# Altium PCB PCB1.PcbDoc
Units mil, origin at the board's own origin, x right, y up, seen from the top; angles counter-clockwise.
Board outline 4330 x 3937 mil, 2 copper layers (Top Layer, Bottom Layer); 241 components, 149 nets, 694 pads, 0 vias.
Unrouted connection lines stored in the file: 335.
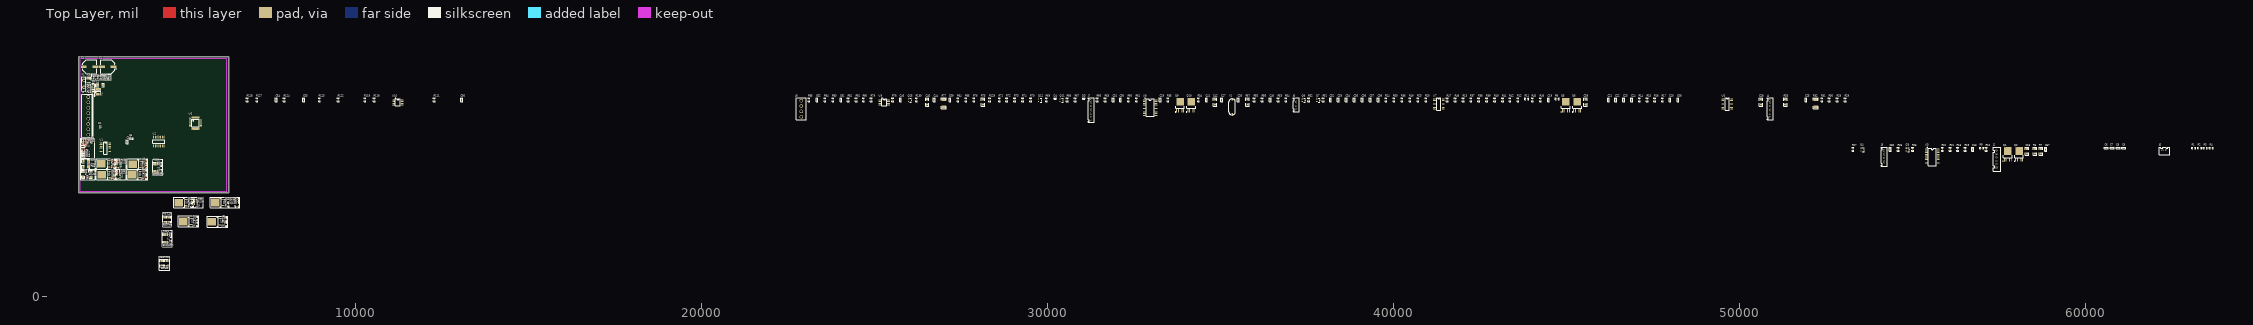
[diagram p0: Top Layer view]
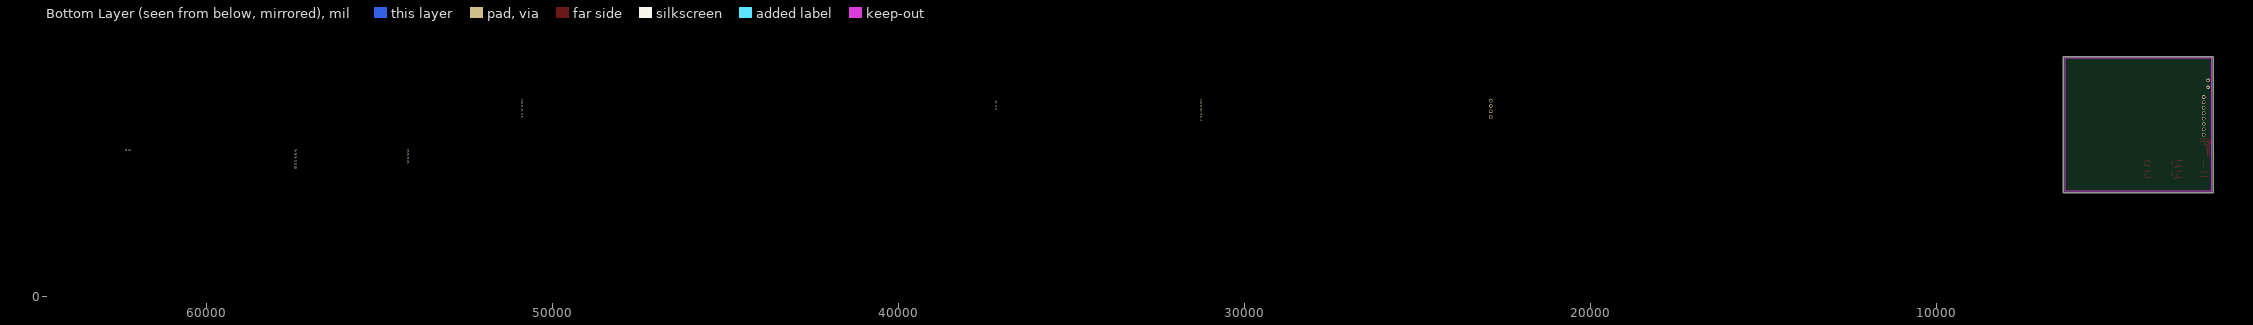
[diagram p1: Bottom Layer view, seen from below]

## Layer stack, top to bottom
Top Layer: signal copper 1.4
Dielectric: dielectric 12.6, FR-4, Dk 4.8
Bottom Layer: signal copper 1.4

## Board outline
2000,3000 6330,3000 6330,6937 2000,6937

## Design rules (kind name [scope] priority, off if disabled: settings)
Clearance [All] p1: gap=8
ComponentClearance [All] p1: gap=1 collisioncheckmode=3 verticalgap=1 showdistances=FALSE
PolygonConnect [All] p1: connectstyle=Relief reliefconductorwidth=10 reliefentries=4 polygonreliefangle="90 Angle"
RoutingVias [All] p1: holewidth=15 width=30 viastyle="Through Hole" minholewidth=28 minwidth=50 maxholewidth=28 maxwidth=50
SilkscreenOverComponentPads [All] p1: minsilkscreentomaskgap=10
SolderMaskExpansion [All] p1: expansion=4
Width [All] p1: maxlimit=50 minlimit=10 preferedwidth=10
26 further rules are at their usual default settings.

## Components (designator, comment, footprint, x,y, rotation, side; value= is the part's Value field where it differs from the comment)
C1 "470uF/35V" CAP_SO_10*10 2160,6650 r90 top
C2 "470uF/35V" CAP_SO_10*10 2995,6640 r270 top
C3 "C1206" 1206 2290,6180 r90 top
C4 "C1206" 1206 2685,6115 r180 top
C5 "C0603" C0603_M1608 3517,4575 r0 top
C6 "C0603" C0603_M1608 60590,4300 r0 top
C7 "C0603" C0603_M1608 60760,4300 r0 top
C8 "C0603" C0603_M1608 60930,4300 r0 top
C9 "C0603" C0603_M1608 61100,4300 r0 top
C10 "C0603" C0603_M1608 3404,4473 r90 top
C11 "C0603" C0603_M1608 2245,4515 r90 top
C12 "C0603" C0603_M1608 2115,4515 r90 top
C13 "C0603" C0603_M1608 56735,4265 r90 top
C14 "C0603" C0603_M1608 2370,4515 r90 top
C15 "C0603" C0603_M1608 2135,4050 r180 top
C16 "C0603" C0603_M1608 2135,4110 r0 top
C17 "C0603" C0603_M1608 2135,4170 r0 top
C18 "C1206" 1206 58305,4135 r90 top
C19 "C0603" C0603_M1608 44470,5690 r90 top
C20 "C0603" C0603_M1608 47985,5690 r90 top
C21 "C0603" C0603_M1608 46205,5690 r90 top
C22 "C0603" C0603_M1608 46415,5690 r90 top
C23 "C0603" C0603_M1608 46645,5690 r90 top
C24 "C0603" C0603_M1608 46875,5690 r90 top
C25 "C0603" C0603_M1608 51915,5690 r90 top
C26 "C0603" C0603_M1608 35510,5690 r90 top
C27 "C0603" C0603_M1608 35030,5690 r90 top
C28 "1206" 1206 50615,5560 r90 top
C29 "C0603" C0603_M1608 33250,5690 r90 top
C30 "C0603" C0603_M1608 32105,5690 r90 top
C31 "C0603" C0603_M1608 31895,5690 r90 top
C32 "C0603" C0603_M1608 38170,5690 r90 top
C33 "C0603" C0603_M1608 38400,5690 r90 top
C34 "C0603" C0603_M1608 38630,5690 r90 top
C35 "C0603" C0603_M1608 38860,5690 r90 top
C36 "C0603" C0603_M1608 39090,5690 r90 top
C37 "C0603" C0603_M1608 39320,5690 r90 top
C38 "C0603" C0603_M1608 39550,5690 r90 top
C39 "C1206" 1206 45540,5560 r90 top
C40 "C0603" C0603_M1608 36430,5690 r90 top
C41 "C0603" C0603_M1608 34590,5690 r90 top
C42 "1206" 1206 34830,5560 r90 top
C43 "C0603" C0603_M1608 2415.51,5970 r0 top
C44 "C0603" C0603_M1608 26720,5690 r90 top
C45 "1206" 1206 26520,5560 r90 top
C46 "C0603" C0603_M1608 25750,5690 r90 top
C47 "C1206" 1206 2270,3926 r180 top
C48 "C1206" 1206 4610,2155 r90 top
C49 "C0603" C0603_M1608 2735,6335 r90 top
C50 "C0603" C0603_M1608 13065,5690 r90 top
C51 "C0603" C0603_M1608 4386.83,3835 r90 top
C52 "C0603" C0603_M1608 4667.17,1785 r90 top
C53 "C0603" C0603_M1608 8500,5690 r90 top
C54 "C0603" C0603_M1608 7710,5690 r90 top
C55 "1206" 1206 4402,898 r90 top
C56 "1206" 1206 2346,3468 r90 top
C57 "C0603" C0603_M1608 58840,4265 r90 top
C58 "C0603" C0603_M1608 48215,5690 r90 top
C59 "C0603" C0603_M1608 27180,5690 r90 top
C60 "C0603" C0603_M1608 54350,4265 r90 top
C61 "C0603" C0603_M1608 24025,5690 r90 top
C62 "C0603" C0603_M1608 23335,5690 r90 top
D1 "RClamp0502B" SOT-523 2610,4915 r180 top
D2 "SOD-523" SOD-523 2415,6170 r180 top
D3 "SOD-523" SOD-523 31045,5730 r0 top
D4 "SOD-523" SOD-523 30215,5730 r0 top
D5 "SOD-523" SOD-523 2850,6325 r270 top
F1 "BK30-400" FUSE-FRG-5MM 2150,6155 r270 top
F2 "1812" 1812 2570,5925 r270 top
J1 "VH3.96-8P" VH3.96-8P 2280,5305 r270 top
J2 "XH2.54-6" XH2.54-6 57415,3980 r90 top
J3 "PH2.0-6P" PH2.0-6P 54160,4050 r90 top
J4 "PH2.0-7P" PH2.0-7P 50865,5435 r90 top
J5 "XH2.54-2" XH2.54-2 62270,4235 r0 top
J6 "PH2.0-4P" PH2.0-4P 37170,5550 r90 top
J7 "PH2.0-8P" PH2.0-8P 31245,5395 r90 top
J8 "VH3.96-4P" VH3.96-4P 22880,5435 r90 top
Q1 "TO-252-4" TO-252-4L 57645,3955 r90 top
Q2 "TO-252-4" TO-252-4L 57970,3955 r90 top
Q3 "SOT-23" SOT-23_L 54850,4255 r0 top
Q4 "SOT-23" SOT-23_L 53545,4255 r0 top
Q5 "TO-252-4" TO-252-4L 44875,5380 r90 top
Q6 "TO-252-4" TO-252-4L 45200,5380 r90 top
Q7 "SOT-23" SOT-23_L 37815,5680 r0 top
Q8 "SOT-23" SOT-23_L 37400,5680 r0 top
Q9 "TO-252-4" TO-252-4L 33725,5380 r90 top
Q10 "TO-252-4" TO-252-4L 34050,5380 r90 top
Q11 "SOT-23" SOT-23_L 30400,5680 r0 top
Q12 "SOT-23" SOT-23_L 29780,5680 r0 top
Q13 "D-PAK" TO-252-2L 2742.52,3845.45 r180 top
Q14 "D-PAK" TO-252-2L 2750,3531 r180 top
Q15 "D-PAK" TO-252-2L 6025,2725 r180 top
Q16 "D-PAK" TO-252-2L 4970,2720 r180 top
Q17 "SOT-23" SOT-23_L 5375,2635 r270 top
Q18 "D-PAK" TO-252-2L 3645,3826 r180 top
Q19 "D-PAK" TO-252-2L 3630.65,3534 r180 top
Q20 "D-PAK" TO-252-2L 5100,2175 r180 top
Q21 "D-PAK" TO-252-2L 5935,2170 r180 top
Q22 "SOT-23" SOT-23_L 3142.52,3775.45 r270 top
Q23 "SOT-23" SOT-23_L 3147.32,3459.17 r270 top
Q24 "SOT-23" SOT-23_L 6575,2650 r270 top
Q25 "SOT-23" SOT-23_L 26020,5680 r0 top
R1 "R0603" 0603 63115,4300 r0 top
R2 "R0603" 0603 63285,4300 r0 top
R3 "R0603" 0603 63455,4300 r0 top
R4 "R0603" 0603 63625,4300 r0 top
R5 "R0603" 0603 2135,4230 r0 top
R6 "R1206" 1206 58525,4135 r90 top
R7 "R1206" 1206 58700,4135 r90 top
R8 "R0603" 0603 44720,5725 r0 top
R9 "R0603" 0603 56990,4300 r0 top
R10 "R0603" 0603 57125,4265 r90 top
R11 "R0603" 0603 43840,5725 r0 top
R12 "R0603" 0603 43590,5690 r90 top
R13 "R0603" 0603 42010,5690 r90 top
R14 "R0603" 0603 47105,5690 r90 top
R15 "R0603" 0603 47325,5690 r90 top
R16 "R0603" 0603 47545,5690 r90 top
R17 "R0603" 0603 47765,5690 r90 top
R18 "R0603" 0603 56295,4265 r90 top
R19 "R0603" 0603 56515,4265 r90 top
R20 "R0603" 0603 40930,5690 r90 top
R21 "R0603" 0603 56085,4265 r90 top
R22 "R0603" 0603 55855,4265 r90 top
R23 "R0603" 0603 40700,5690 r90 top
R24 "R0603" 0603 39780,5690 r90 top
R25 "R0603" 0603 54995,4265 r90 top
R26 "R0603" 0603 54580,4265 r90 top
R27 "R0603" 0603 53275,4265 r90 top
R28 "R0603" 0603 52815,5690 r90 top
R29 "R0603" 0603 53045,5690 r90 top
R30 "R0603" 0603 52585,5690 r90 top
R31 "R0603" 0603 52375,5690 r90 top
R32 "R2512" R2512 52195,5480 r90 top
R33 "R1206" 1206 51315,5560 r90 top
R34 "R0603" 0603 34360,5690 r90 top
R35 "R0603" 0603 33480,5690 r90 top
R36 "R0603" 0603 40240,5690 r90 top
R37 "R0603" 0603 42230,5690 r90 top
R38 "R0603" 0603 42460,5690 r90 top
R39 "R0603" 0603 42690,5690 r90 top
R40 "R0603" 0603 42920,5690 r90 top
R41 "R0603" 0603 43150,5690 r90 top
R42 "R0603" 0603 43360,5690 r90 top
R45 "R0603" 0603 44010,5690 r90 top
R46 "R0603" 0603 44240,5690 r90 top
R47 "R0603" 0603 41550,5690 r90 top
R48 "R0603" 0603 41780,5690 r90 top
R49 "R0603" 0603 40470,5690 r90 top
R50 "R0603" 0603 40010,5690 r90 top
R51 "R0603" 0603 37960,5690 r90 top
R52 "R0603" 0603 37545,5690 r90 top
R53 "R0603" 0603 36660,5690 r90 top
R54 "R0603" 0603 36890,5690 r90 top
R55 "R0603" 0603 35970,5690 r90 top
R56 "R0603" 0603 36200,5690 r90 top
R57 "R1206" 1206 35770,5560 r90 top
R58 "R0603" 0603 2415.51,5900 r0 top
R59 "R0603" 0603 2415,6110 r180 top
R60 "R0603" 0603 32335,5690 r90 top
R61 "R0603" 0603 32565,5690 r90 top
R62 "R0603" 0603 2415,6040 r180 top
R63 "R0603" 0603 31665,5690 r90 top
R64 "R0603" 0603 27410,5690 r90 top
R65 "R0603" 0603 27640,5690 r90 top
R66 "R0603" 0603 31435,5690 r90 top
R67 "R0603" 0603 30795,5690 r90 top
R68 "R0603" 0603 30565,5690 r90 top
R69 "R0603" 0603 29965,5690 r90 top
R70 "R0603" 0603 29510,5690 r90 top
R71 "R0603" 0603 28610,5690 r90 top
R72 "R0603" 0603 28820,5690 r90 top
R73 "R0603" 0603 29050,5690 r90 top
R74 "R0603" 0603 29280,5690 r90 top
R75 "R1206" 1206 28130,5560 r90 top
R76 "R0603" 0603 27870,5690 r90 top
R77 "R2512" R2512 27000,5480 r90 top
R78 "R0603" 0603 25520,5690 r90 top
R79 "R0603" 0603 24905,5690 r90 top
R80 "R0603" 0603 24675,5690 r90 top
R81 "R0603" 0603 24465,5690 r90 top
R82 "R0603" 0603 24235,5690 r90 top
R83 "R0603" 0603 23795,5690 r90 top
R84 "R0603" 0603 23565,5690 r90 top
R85 "R0603" 0603 23105,5690 r90 top
R86 "R1206" 1206 2135,3756 r0 top
R87 "R1206" 1206 4489,2290 r270 top
R88 "R0603" 0603 3037.52,3900.45 r90 top
R89 "R0603" 0603 3042.32,3579.17 r90 top
R90 "R0603" 0603 5265,2775 r90 top
R91 "R0603" 0603 6330,2780 r90 top
R92 "R0603" 0603 2405,6335 r90 top
R93 "R0603" 0603 2515,6335 r270 top
R94 "R0603" 0603 3037.52,3770.45 r90 top
R95 "R0603" 0603 3042.32,3454.17 r90 top
R96 "R0603" 0603 5270,2645 r90 top
R97 "R0603" 0603 6330,2655 r90 top
R98 "R0603" 0603 3147.32,3624.17 r0 top
R99 "R0603" 0603 5380,2805 r180 top
R100 "R0603" 0603 6575,2815 r0 top
R101 "R0603" 0603 2625,6335 r270 top
R102 "R0603" 0603 3142.52,3935.45 r180 top
R103 "R0603" 0603 3142.52,3875.45 r0 top
R104 "R0603" 0603 3965,3916 r90 top
R105 "R0603" 0603 3960.65,3604 r90 top
R106 "R0603" 0603 5380,2740 r0 top
R107 "R0603" 0603 5432.32,2253.17 r90 top
R108 "R0603" 0603 6265,2240 r90 top
R109 "R0603" 0603 6575,2755 r0 top
R110 "R0603" 0603 3147.32,3564.17 r0 top
R111 "R0603" 0603 12275,5690 r90 top
R112 "R0603" 0603 3965,3759 r90 top
R113 "R0603" 0603 3960.65,3449 r90 top
R114 "R0603" 0603 5432.32,2098.17 r90 top
R115 "R0603" 0603 6265,2090 r90 top
R116 "R0603" 0603 4386.83,3630 r90 top
R117 "R0603" 0603 4667.17,1580 r90 top
R118 "R0603" 0603 10540,5690 r90 top
R119 "R0603" 0603 10270,5690 r90 top
R120 "R2512" R2512 4221.83,3620 r90 top
R121 "R2512" R2512 4505,1575 r90 top
R122 "R0603" 0603 9500,5690 r90 top
R123 "R0603" 0603 8960,5690 r90 top
R124 "R0603" 0603 7940,5690 r90 top
R125 "R1206" 1206 4540,895 r90 top
R126 "R1206" 1206 2131,3468 r90 top
R127 "R0603" 0603 7150,5690 r90 top
R128 "R0603" 0603 6870,5690 r90 top
R129 "R0603" 0603 28330,5690 r90 top
R130 "R0603" 0603 26210,5690 r90 top
U1 "SO-14" SO-14 2646,4448 r0 top
U2 "SO-14" SO-14 4466,4613 r270 top
U3 "SOP-20" SOP-20 55565,4040 r0 top
U4 "XC6503D331" SOT23-5 2135,4350 r270 top
U5 "SO-14" SO-14 49510,5720 r0 top
U6 "LQFP48_N" LQFP48_N 5375,5021 r0 top
U7 "SO-14" SO-14 41175,5720 r0 top
U8 "SOP-20" SOP-20 32960,5465 r0 top
U9 "SO-8" SO-8 25155,5690 r0 top
U10 "SO-8" SO-8 11100,5690 r0 top
X1 "8M" HC-49SMD 35330,5490 r90 top

## Footprints (in the part's own frame and the unit in brackets; to place one, negate y for a bottom-side part, rotate by r counter-clockwise, add the part's x,y. Pads: shape width x height; smd on the part's side, far side on the other; paste and mask are expansions set on the pad)
0603 [mm]
  rect 0.95x0.9 smd: 1(-0.775,0) 2(0.775,0)
  silkscreen extent -1.47,-0.65 1.47,0.65
1206 [mil]
  rect 60x60 smd: 1(0,0) 2(135,0)
  silkscreen extent -50,-50 185,50
1812 [mm] "Chip Capacitor; Body 4.5 x 3.2 mm (LxW ty"
  rect 1.9x3.4 smd: 1(-1.95,0) 2(1.95,0)
  silkscreen extent -0.7,-1.6 0.7,1.6
C0603_M1608 [mm] "Chip Capacitor, 2-Leads, Body 1.6x0.8mm, IPC Medium Densi"
  rect 0.95x0.9 smd: 1(-0.775,0) 2(0.775,0)
  silkscreen extent -1.47,-0.65 1.47,0.65
CAP_SO_10*10 [mm]
  rect 2.05x4.2 smd: 1(-0.127,0.313) 2(-0.127,-8.187)
  silkscreen extent -5.28,-9.09 5.02,2.29
FUSE-FRG-5MM [mm]
  round 2.5 hole 1.4: 1(-2.54,0) 2(2.54,0)
  silkscreen extent -5.33,-1.52 5.33,1.52
HC-49SMD [mm]
  rect 2x1 smd: 1(-5.588,0) 2(5.588,0)
  silkscreen extent -5.85,-2.46 5.78,2.41
LQFP48_N [mm]
  oval 1.8x0.3 smd: 1(-4.05,2.75) 2(-4.05,2.25) 3(-4.05,1.75) 4(-4.05,1.25) 5(-4.05,0.75) 6(-4.05,0.25) 7(-4.05,-0.25) 8(-4.05,-0.75) 9(-4.05,-1.25) 10(-4.05,-1.75) 11(-4.05,-2.25) 12(-4.05,-2.75) 25(4.05,-2.75) 26(4.05,-2.25) 27(4.05,-1.75) 28(4.05,-1.25) 29(4.05,-0.75) 30(4.05,-0.25) 31(4.05,0.25) 32(4.05,0.75) 33(4.05,1.25) 34(4.05,1.75) 35(4.05,2.25) 36(4.05,2.75)
  oval 0.3x1.8 smd: 13(-2.75,-4.05) 14(-2.25,-4.05) 15(-1.75,-4.05) 16(-1.25,-4.05) 17(-0.75,-4.05) 18(-0.25,-4.05) 19(0.25,-4.05) 20(0.75,-4.05) 21(1.25,-4.05) 22(1.75,-4.05) 23(2.25,-4.05) 24(2.75,-4.05) 37(2.75,4.05) 38(2.25,4.05) 39(1.75,4.05) 40(1.25,4.05) 41(0.75,4.05) 42(0.25,4.05) 43(-0.25,4.05) 44(-0.75,4.05) 45(-1.25,4.05) 46(-1.75,4.05) 47(-2.25,4.05) 48(-2.75,4.05)
  silkscreen extent -4.17,-2.75 2.75,3.57
PH2.0-4P [mm]
  rect 1.2x1.4 hole 0.8: 1(-3,0)
  oval 1.2x1.4 hole 0.8: 2(-1,0) 3(1,0) 4(3,0)
  silkscreen extent -5.01,-2.72 5,1.88
PH2.0-6P [mm]
  rect 1.2x1.4 hole 0.8: 1(-5,0)
  oval 1.2x1.4 hole 0.8: 2(-3,0) 3(-1,0) 4(1,0) 5(3,0) 6(5,0)
  silkscreen extent -7.01,-2.72 7,1.88
PH2.0-7P [mm]
  rect 1.2x1.4 hole 0.8: 1(-6,0)
  oval 1.2x1.4 hole 0.8: 2(-4,0) 3(-2,0) 4(0,0) 5(2,0) 6(4,0) 7(6,0)
  silkscreen extent -8.01,-2.72 8,1.88
PH2.0-8P [mm]
  rect 1.2x1.4 hole 0.8: 1(-7,0)
  oval 1.2x1.4 hole 0.8: 2(-5,0) 3(-3,0) 4(-1,0) 5(1,0) 6(3,0) 7(5,0) 8(7,0)
  silkscreen extent -9.01,-2.72 9,1.88
R2512 [mil]
  rect 80x125 smd: 1(0,0) 2(220,0)
  silkscreen extent -50,-73 270,73
SO-8 [mil]
  oval 80x24 smd: 1(0,0) 2(0,-50) 3(0,-100) 4(0,-150) 5(246.18,-150) 6(246.18,-100) 7(246.18,-50) 8(246.18,0)
  silkscreen extent 51,-175 194,58
SO-14 [mil]
  oval 80x24 smd: 1(0,0) 2(0,-50) 3(0,-100) 4(0,-150) 5(0,-200) 6(0,-250) 7(0,-300) 8(253.66,-300) 9(253.66,-250) 10(253.66,-200) 11(253.66,-150) 12(253.66,-100) 13(253.66,-50) 14(253.66,0)
  silkscreen extent 75,-325 180,25
SOD-523 [mm]
  rect 0.8x0.35 smd: 1(-0.762,0) 2(0.762,0)
  silkscreen extent -0.76,-0.51 1.19,0.51
SOP-20 [mil]
  oval 80x24 smd: 1(-169.29,225) 2(-169.29,175) 3(-169.29,125) 4(-169.29,75) 5(-169.29,25) 6(-169.29,-25) 7(-169.29,-75) 8(-169.29,-125) 9(-169.29,-175) 10(-169.29,-225) 11(169.29,-225) 12(169.29,-175) 13(169.29,-125) 14(169.29,-75) 15(169.29,-25) 16(169.29,25) 17(169.29,75) 18(169.29,125) 19(169.29,175) 20(169.29,225)
  silkscreen extent -149,-251 118,283
SOT23-5 [mil] "SOT23, 5-Leads, Body 3.1x3.0mm (max), Pitch 0.95mm, IPC Medium Densi"
  rect 40x20 smd: 1(-55,37.4)
  oval 40x20 smd: 2(-55,0) 3(-55,-37.4) 4(55,-37.4) 5(55,37.4)
  silkscreen extent -59,-57 26,70
SOT-23_L [mm]
  rect 1x0.8 smd: 1(-1.1,0.953) 2(-1.1,-0.953) 3(1.1,-0.013)
  silkscreen extent -0.97,-1.46 1.14,1.71
SOT-523 [mm] "SOT23, 3-Leads, Body 1.7x1.8mm (max), Pitch 0.50mm, IPC Medium Densi"
  rect 0.85x0.4 smd: 1(-0.825,0.5) 2(-0.825,-0.5) 3(0.825,0)
  silkscreen extent -0.25,-0.85 0.42,0.85
TO-252-2L [mm]
  rect 2.55x0.8 smd: 1(-4,2.3) 2(-4,-2.3)
  rect 6.25x5.55 smd: 3(2.15,0)
  silkscreen extent -5.13,-3.25 -1.35,3.32
TO-252-4L [mm]
  rect 2.55x0.7 smd: 1(0,0) 2(0,-1.27) 3(0,-3.81) 4(0,-5.08)
  rect 5.6x5.5 smd: 5(6.5,-2.54)
  silkscreen extent -1.12,-5.79 3.35,0.98
VH3.96-4P [mm]
  oct 2.6x2.6 hole 1.8: 1(-5.94,0)
  round 2.6 hole 1.8: 2(-1.98,0) 3(1.98,0) 4(5.94,0)
  silkscreen extent -8.02,-3.68 8.03,4.19
VH3.96-8P [mm]
  oct 2.6x2.6 hole 1.8: 1(-11.88,0)
  round 2.6 hole 1.8: 2(-7.92,0) 3(-3.96,0) 4(0,0) 5(3.96,0) 6(7.92,0) 7(11.88,0) 8(15.84,0)
  silkscreen extent -13.89,-4.8 17.84,4.97
XH2.54-2 [mm]
  rect 1.4x1.4 hole 1: 1(-1.27,0)
  round 1.4 hole 1: 2(1.27,0)
  silkscreen extent -3.81,-3.35 3.81,2.29
XH2.54-6 [mm]
  rect 1.4x1.4 hole 1: 1(-6.35,0)
  round 1.4 hole 1: 2(-3.81,0) 3(-1.27,0) 4(1.27,0) 5(3.81,0) 6(6.35,0)
  silkscreen extent -8.89,-3.35 8.76,2.29

## Part data
C1 C2: library part "Cap Pol3", "Polarized Capacitor (Surface Moun"
C3 C4 C18 C28 C39 C42 C45 C47 C48 C55 C56: library part Cap, "Capacit"
C5 C6 C7 C8 C9 C10 C11 C12 C13 C14 C15 C16 C17 C19 C20 C21 C22 C23 C24 C25 C26 C27 C29 C30 C31 C32 C33 C34 C35 C36 C37 C38 C40 C41 C43 C44 C46 C49 C50 C51 C52 C53 C54 C57 C58 C59 C60 C61 C62: library part Cap, "Capacitor"
D1: library part LCTVS
D2 D3 D4 D5: library part DIODE, "Default Dio"
F1: library part PP
F2: library part PPTC
J1: library part VH3.96-
J2: library part PH2.0-6P, "Header, 6-P"
J3 J7: "Header, 6-P"
J4: "Header, 7-P"
J5: library part XH2P, "Header, 2-P"
J6: library part "Header 4", "Header, 4-P"
J8: "Header, 3-P"
Q1 Q2 Q5 Q6 Q9 Q10: library part MOS-DUAL-N
Q3 Q4 Q7 Q8 Q11 Q12 Q17 Q22 Q23 Q24 Q25: library part NPN, "NPN Bipolar Transist"
Q13 Q14 Q15 Q16: library part MOS-P, "P-Channel MOSF"
Q18 Q19 Q20 Q21: library part MOS-N, "N-Channel MOSF"
R1 R2 R3 R4 R5 R6 R7 R8 R9 R10 R11 R12 R13 R14 R15 R16 R17 R18 R19 R20 R21 R22 R23 R24 R25 R26 R27 R28 R29 R30 R31 R32 R33 R34 R35 R36 R37 R38 R39 R40 R41 R42 R45 R46 R47 R48 R49 R50 R51 R52 R53 R54 R55 R56 R57 R58 R59 R60 R61 R62 R63 R64 R65 R66 R67 R68 R69 R70 R71 R72 R73 R74 R75 R76 R77 R78 R79 R80 R81 R82 R83 R84 R85 R86 R87 R88 R89 R90 R91 R92 R93 R94 R95 R96 R97 R98 R99 R100 R101 R102 R103 R104 R105 R106 R107 R108 R109 R110 R111 R112 R113 R114 R115 R116 R117 R118 R119 R120 R121 R122 R123 R124 R125 R126 R127 R128 R129 R130: library part Res1, "Resist"
U1 U5 U7: library part SN74AHCT08N, "Quadruple 2-Input Positive-AND Ga"
U2: library part SN74ACT14N, "Hex Schmitt-Trigger Invert"
U3 U8: library part 74HC2
U4: library part XC6503Dxxx
U6: library part STM32F103C8T6, "STM32 ARM-based 32-bit MCU with 64 Kbytes Flash, 48-pin LQFP, Industrial Temperatu"
X1: library part XT

## Nets (pads, with @x,y where several pads share a name; then routed paths per layer and width w, separated by ;. In a path a pad name is that pad's centre, name@x,y a point inside that pad or via, vN(x,y) a via of type N, cw(c..) or ccw(c..) an arc to the next point about the centre after c; other vN are vias at no path point)
3.3V: C13.1 C15.1 C16.2 C17.2 C19.1 C30.1 C31.1 C41.1 C46.1 C50.1 C57.1 C58.1 C60.1 D2.2 D5.2 J2.6 J3.1 J4.1 J6.1 R1.2 R2.2 R3.2 R4.2 R5.2 R14.2 R15.2 R16.2 R17.2 R35.2 R37.2 R38.2 R39.2 R40.2 R41.2 R42.2 R64.2 R78.1 R80.1 R111.2 R119.2 R129.1 U3.20 U4.5 U6.1 U6.9 U6.24 U6.48 U8.20 U9.8 U10.8 | length 247.9
  Top Layer w10: C15.1 C16.2 C17.2 R5.2 2172.4,4236.89 U4.5
24V: C1.1 C3.1 C47.1 C48.1 F1.1 Q13.2 Q14.2 Q15.2 Q16.2 R86.2 R87.2 R88.2 R89.2 R90.2 R91.2 R92.2 | length 449.4
  Top Layer w10: Q13.2 2905.04,3930.96 R88.2 ; Q14.2 3030.46,3621.55 R89.2
  Top Layer w25: R86.2 C47.1
ADC-H-IN: C25.1 R27.1 U10.3
ADC-HEAD: C53.1 R118.2 U6.19
ADC-L: C61.1 R79.2 U6.10
ADC-L-IN: C51.1 R116.2 U9.3
ADC-R: C62.1 R81.1 U6.11
ADC-R-IN: C52.1 R117.2 U9.5
ADC-W-IN: C44.1 R76.1 U10.5
ADC-WING: C54.1 R122.1 U6.18
DIR1N: R98.1 U1.2 U2.2
DIR2N: R100.1 U1.10 U2.4
DIR3N: R25.1 U2.6 U5.5
DIR4N: R51.1 U2.8 U5.10
DIR5N: R69.1 U2.10 U7.5
DIR-IO-1: R102.2 U1.4 U2.1 U6.29
DIR-IO-2: R99.2 U1.12 U2.3 U6.39
DIR-IO-3: R26.2 U2.5 U5.1 U6.20
DIR-IO-4: R52.2 U2.9 U5.12 U6.21
DIR-IO-5: R70.2 U2.11 U6.22 U7.1
ENC-HEAD-A: U3.5 U6.35
ENC-HEAD-A1: C9.1 J2.5 R4.1 U3.15
ENC-HEAD-B: U3.4 U6.36
ENC-HEAD-B1: C8.1 J2.4 R3.1 U3.16
ENC-L-A: U6.33 U8.5
ENC-L-A-J: C33.1 J7.2 R37.1 U8.15
ENC-L-B: U6.32 U8.4
ENC-L-B-J: C34.1 J7.3 R38.1 U8.16
ENC-R-A: U6.31 U8.3
ENC-R-A-J: C36.1 J7.5 R40.1 U8.17
ENC-R-B: U6.30 U8.2
ENC-R-B-J: C37.1 J7.6 R41.1 U8.18
ENC-W-L: U3.7 U6.40
ENC-W-L1: C22.1 J3.3 R15.1 U3.13
ENC-W-R: U3.9 U6.41
ENC-W-R1: C24.1 J4.3 R17.1 U3.11
FAULT: D3.1 D4.1 Q25.3 R129.2 U6.4
GND: C1.2 C2.2 C3.2 C4.2 C5.2 C6.2 C7.2 C8.2 C9.2 C10.2 C11.1 C12.1 C13.2 C14.1 C15.2 C16.1 C17.1 C18.2 C19.2 C20.1 C21.2 C22.2 C23.2 C24.2 C25.2 C26.1 C27.1 C29.1 C30.2 C31.2 C32.2 C33.2 C34.2 C35.2 C36.2 C37.2 C38.2 C39.2 C40.2 C41.2 C43.2 C44.2 C46.2 C47.2 C48.2 C49.2 C50.2 C51.2 C52.2 C53.2 C54.2 C57.2 C58.2 C59.2 C60.2 C61.2 C62.2 D1.3 J1.3 J1.4 J2.1 J3.4 J4.4 J6.4 J7.1 Q3.2 Q4.2 Q7.2 Q8.2 Q11.2 Q12.2 Q17.2 Q22.2 Q23.2 Q24.2 Q25.2 R5.1 R6.1 R7.1 R8.2 R11.2 R13.2 R20.2 R24.2 R28.1 R31.2 R32.2 R34.1 R36.1 R53.1 R56.1 R62.1 R71.1 R74.1 R77.2 R84.2 R85.2 R86.1 R87.1 R101.1 R103.1 R106.1 R109.1 R110.1 R120.2 R121.2 R127.1 R128.1 U1.7 U2.7 U3.1 U3.10 U3.19 U4.2 U5.7 U6.8 U6.23 U6.47 U7.7 U8.1 U8.10 U8.11 U8.19 U9.4 U10.4 | length 835.5
  Top Layer w10: C15.2 C16.1 C17.1 R5.1 2149.4,4274.91 2149.4,4314.53 2245,4410.12 C11.1 ; U4.2 2135,4436 2115,4456 C12.1 C11.1 ; C14.1 C11.1
HEAD_IO_L: U3.3 U6.45
HEAD_IO_L1: C7.1 J2.3 R2.1 U3.17
HEAD_IO_R: U3.2 U6.46
HEAD_IO_R1: C6.1 J2.2 R1.1 U3.18
MOT-H-A: C28.2 J5.1 Q1.5 R33.2
MOT-H-B: C28.1 J5.2 Q2.5 R33.1
MOT-L-A: C56.2 J8.1 Q13.3 Q18.3 R126.2 | length 215
  Top Layer w25: R126.2 C56.2
MOT-L-B: C56.1 J8.2 Q14.3 Q19.3 R126.1 | length 215
  Top Layer w25: R126.1 C56.1
MOT-R-A: C55.2 J8.3 Q16.3 Q20.3 R125.2
MOT-R-B: C55.1 J8.4 Q15.3 Q21.3 R125.1
MOT-STOP1: C32.1 J1.5 R36.2 U8.12
MOT-W-LA: C42.2 J3.6 Q5.5 R57.2
MOT-W-LB: C42.1 J3.5 Q6.5 R57.1
MOT-W-RA: C45.2 J4.7 Q9.5 R75.2
MOT-W-RB: C45.1 J4.6 Q10.5 R75.1
NetC26_2: C26.2 U6.5 X1.2
NetC27_2: C27.2 U6.6 X1.1
NetC29_2: C29.2 R35.1 U6.7
NetC43_1: C43.1 R58.1 R59.2 R62.2
NetC49_1: C49.1 R92.1 R93.2 R101.2
NetC59_1: C59.1 J7.8 R64.1 R65.1
NetQ1_1: Q1.1 Q2.1 R21.2 R22.2 R27.2 R32.1
NetQ1_2: Q1.2 R22.1 R29.1
NetQ1_4: Q1.4 R9.1 R18.2
NetQ2_2: Q2.2 R21.1 R30.1
NetQ2_4: Q2.4 R10.1 R19.2
NetQ3_1: Q3.1 R26.1 R28.2
NetQ3_3: Q3.3 R18.1
NetQ4_1: Q4.1 R25.2 R31.1
NetQ4_3: Q4.3 R19.1
NetQ5_1: Q5.1 Q6.1 Q9.1 Q10.1 R49.1 R50.1 R67.1 R68.1 R76.2 R77.1
NetQ5_2: Q5.2 R49.2 R54.1
NetQ5_4: Q5.4 R45.1 R47.2
NetQ6_2: Q6.2 R50.2 R55.1
NetQ6_4: Q6.4 R46.1 R48.2
NetQ7_1: Q7.1 R52.1 R53.2
NetQ7_3: Q7.3 R47.1
NetQ8_1: Q8.1 R51.2 R56.2
NetQ8_3: Q8.3 R48.1
NetQ9_2: Q9.2 R68.2 R72.1
NetQ9_4: Q9.4 R60.1 R63.2
NetQ10_2: Q10.2 R67.2 R73.1
NetQ10_4: Q10.4 R61.1 R66.2
NetQ11_1: Q11.1 R70.1 R71.2
NetQ11_3: Q11.3 R63.1
NetQ12_1: Q12.1 R69.2 R74.2
NetQ12_3: Q12.3 R66.1
NetQ13_1: Q13.1 R88.1 R94.2 | length 225.6
  Top Layer w10: Q13.1 2991.46,3754.9 R94.2 R88.1
NetQ14_1: Q14.1 R89.1 R95.2 | length 217.1
  Top Layer w10: Q14.1 2998.09,3440.45 R95.2 R89.1
NetQ15_1: Q15.1 R91.1 R97.2
NetQ16_1: Q16.1 R90.1 R96.2
NetQ17_1: Q17.1 R99.1 R106.2
NetQ17_3: Q17.3 R96.1
NetQ18_1: Q18.1 R104.1 R112.2 | length 280.9
  Top Layer w10: Q18.1 3856.54,3789.51 R112.2 R104.1
NetQ18_2: Q18.2 Q19.2 R104.2 R105.2 R116.1 R120.1 | length 351.6
  Top Layer w10: Q19.2 3950.69,3624.55 R105.2 ; Q18.2 3935.04,3916.55 R104.2
NetQ19_1: Q19.1 R105.1 R113.2 | length 281.4
  Top Layer w10: Q19.1 3924.58,3443.45 R113.2 R105.1
NetQ20_1: Q20.1 R107.1 R114.2
NetQ20_2: Q20.2 Q21.2 R107.2 R108.2 R117.1 R121.1
NetQ21_1: Q21.1 R108.1 R115.2
NetQ22_1: Q22.1 R102.1 R103.2 | length 119.6
  Top Layer w10: R102.1 R103.2 3180.02,3868.46 Q22.1
NetQ22_3: Q22.3 R94.1 | length 107.7
  Top Layer w10: R94.1 3134.22,3739.94 Q22.3
NetQ23_1: Q23.1 R98.2 R110.2 | length 124.6
  Top Layer w10: R98.2 R110.2 3184.82,3557.19 Q23.1
NetQ23_3: Q23.3 R95.1 | length 107.7
  Top Layer w10: R95.1 3139.03,3423.66 Q23.3
NetQ24_1: Q24.1 R100.2 R109.2
NetQ24_3: Q24.3 R97.1
NetQ25_1: Q25.1 R130.1
NetR34_2: R34.2 U6.44
NetR78_2: R78.2 R79.1 R82.1 U9.1
NetR80_2: R80.2 R81.2 R83.1 U9.7
NetR82_2: R82.2 R84.1 U9.2
NetR83_2: R83.2 R85.1 U9.6
NetR111_1: R111.1 R118.1 R123.2 U10.1
NetR119_1: R119.1 R122.2 R124.2 U10.7
NetR123_1: R123.1 R127.2 U10.2
NetR124_1: R124.1 R128.2 U10.6
NetR130_2: R130.2 U8.8
PWM-1-A: R112.1 U1.3
PWM-1-B: R113.1 U1.6
PWM-2-A: R114.1 U1.8
PWM-2-B: R115.1 U1.11
PWM-3-A: R29.2 U5.6
PWM-3-B: R30.2 U5.3
PWM-4-A: R54.2 U5.8
PWM-4-B: R55.2 U5.11
PWM-5-A: R72.2 U7.6
PWM-5-B: R73.2 U7.3
PWM-IO-1: R8.1 U1.1 U1.5 U6.12
PWM-IO-2: R11.1 U1.9 U1.13 U6.13
PWM-IO-3: R13.1 U5.2 U5.4 U6.14
PWM-IO-4: R20.1 U5.9 U5.13 U6.16
PWM-IO-5: R24.1 U6.17 U7.2 U7.4
SEN1: D2.1 R59.1 U6.27
SEN2: D5.1 R93.1 U6.26
SWCLK: J6.3 U6.37
SWDIO: J6.2 U6.34
UART1RX: R23.1 U6.43
UART1RX-J: D1.2 J1.6 R23.2
UART1TX: R12.1 U6.42
UART1TX-J: D1.1 J1.7 R12.2
VCC-5V: C5.1 C10.1 C11.2 C12.2 C14.2 C20.2 C40.1 J1.8 R65.2 U1.14 U2.13 U2.14 U4.1 U4.3 U5.14 U7.9 U7.10 U7.12 U7.13 U7.14 | length 577.2
  Top Layer w10: U4.1 2172.4,4371.4 2155,4354 2118,4354 2097.6,4374.4 U4.3 2079,4423.6 2079,4517 2107.51,4545.51 C12.2 C11.2 C14.2
VCC-22V: F2.2 J1.2
VCC-22V-O: C2.1 C4.1 C18.1 C39.1 F2.1 Q1.3 Q2.3 Q5.3 Q6.3 Q9.3 Q10.3 R6.2 R7.2 R9.2 R10.2 R45.2 R46.2 R58.2 R60.2 R61.2
VCC-24V: F1.2 J1.1
W_IO_L: U3.6 U6.28
W_IO_L1: C21.1 J3.2 R14.1 U3.14
W_IO_R: U3.8 U6.38
W_IO_R1: C23.1 J4.2 R16.1 U3.12
WHEEL-FLOAT-L: D4.2 U6.3 U8.6
WHEEL-FLOAT-L1: C35.1 J7.4 R39.1 U8.14
WHEEL-FLOAT-R: D3.2 U6.2 U8.7
WHEEL-FLOAT-R1: C38.1 J7.7 R42.1 U8.13
pads on no net: J4.5 U2.12 U4.4 U6.15 U6.25 U7.8 U7.11 U8.9

## Keep-outs
Keep-Out Layer:
  lines w10: 2050,3050 2050,6887 6280,6887 6280,3050 2050,3050

## Silkscreen, mask and mechanical layers (free items; w line width, h text height)
Top Overlay:
  lines w10: 2512.32,3384.17 2512.32,3679.17 3372.32,3679.17 ; 2517.32,3379.17 3372.32,3379.17 ; 3377.32,3384.17 3377.32,3674.17 ; 4680.53,2027.41 4425.53,2027.41 4425.53,2437.41 4685.53,2437.41 4685.53,2032.41 ; 4740,2575 4740,2870 5600,2870 ; 4745,2570 5600,2570 ; 5605,2575 5605,2865 ; 5795,2580 5795,2875 6655,2875 ; 5800,2575 6655,2575 ; 6660,2580 6660,2870 ; 2065,3376 2065,3676 2475,3676 2475,3376 2065,3376 ; 2065,3691 2475,3691 2475,3991 2065,3991 2065,3691 ; 2065,4010 2470,4010 2470,4585 2065,4585 2065,4010 ; 2365,6260 2370,6265 2940,6265 2940,6415 2365,6415 2365,6260 ; 2512.52,3695.45 2517.52,3690.45 3372.52,3690.45 3377.52,3695.45 3377.52,3985.45 3372.52,3990.45 2512.52,3990.45 2512.52,3695.45 ; 3402.97,3375 3991.65,3375 3997.97,3381.32 3997.97,3679 3402.97,3679 3402.97,3375 ; 3405,3691 4000,3691 4000,3986 3405,3986 3405,3691 ; 4139,3505 4424,3505 4424,3980 4139,3980 4139,3505 ; 4325,770 4625,770 4625,1170 4620,1175 4325,1175 4325,770 ; 4417.17,1450 4417.17,1925 4702.17,1925 4702.17,1450 4417.17,1450 ; 4874.65,2021.35 5469.65,2021.35 5469.65,2336.35 4874.65,2336.35 4874.65,2021.35 ; 5709.65,2011.35 5709.65,2326.35 6304.65,2326.35 6304.65,2011.35 5709.65,2011.35
  text "A24top" at 2240,3821 h40
  text "A24down" at 4154,3515 h40
  text "AOutF" at 2284,3511 h40
  text "B24Top" at 4445,2048 h40
  text "B24down" at 4432.17,1465 h40
  text "BOutF" at 4385,790 h40
Drill Drawing:
  text ".LEGEND" at 6530,3200 h60
  text "Drill Drawing." at 6530,3100 h60